# Altium PCB Servo_driver.PcbDoc
Units mm, origin at the board's own origin, x right, y up, seen from the top; angles counter-clockwise.
Board outline 152.4 x 101.6 mm, 2 copper layers (Top Layer, Bottom Layer); 101 components, 116 nets, 489 pads, 3 vias.
Unrouted connection lines stored in the file: 244.
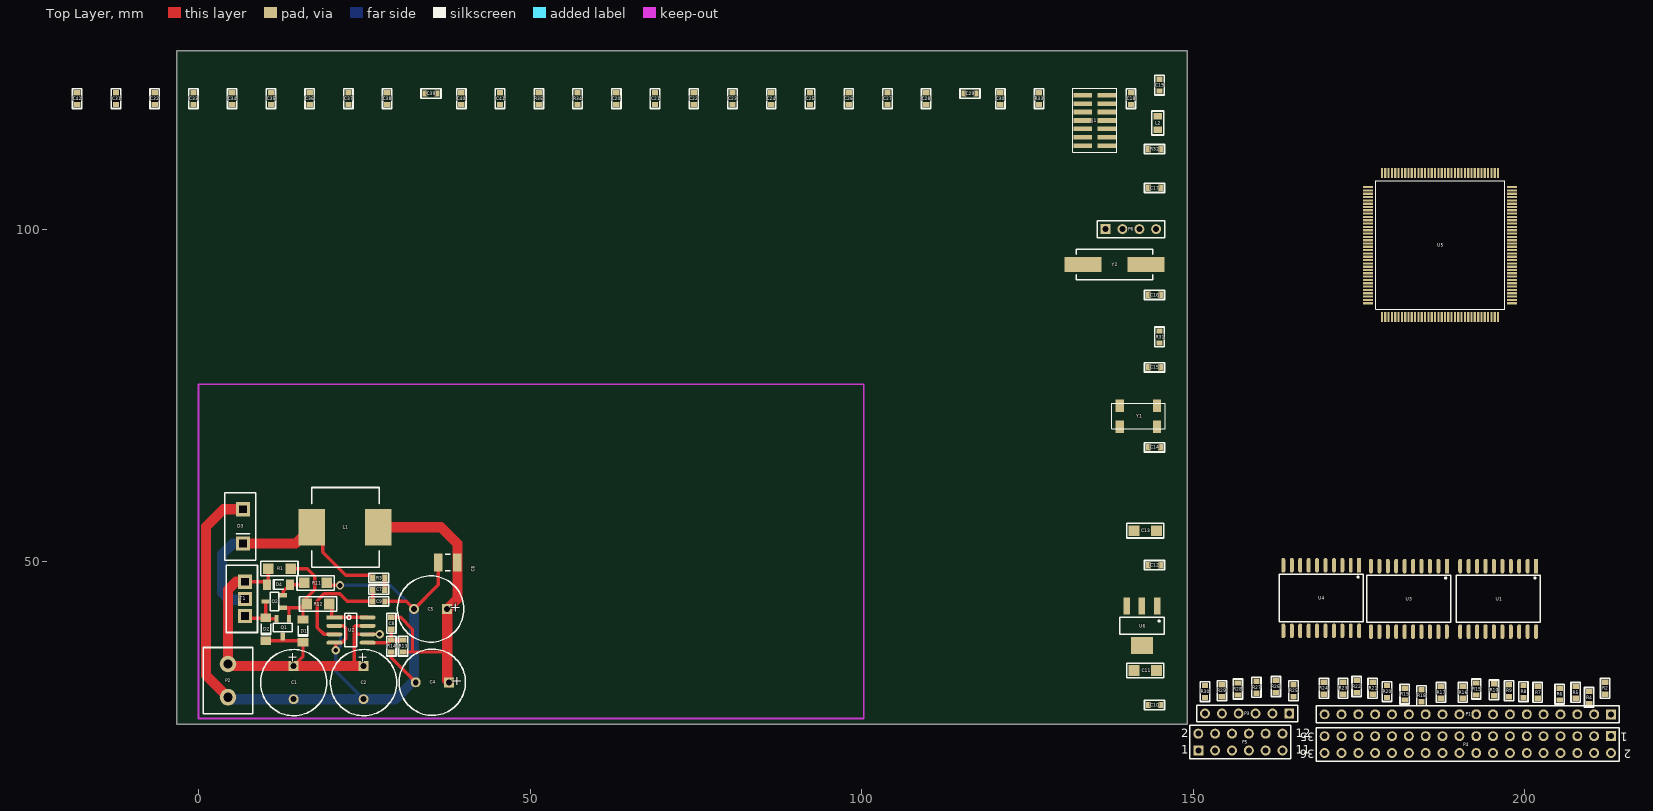
[diagram p0: Top Layer view]
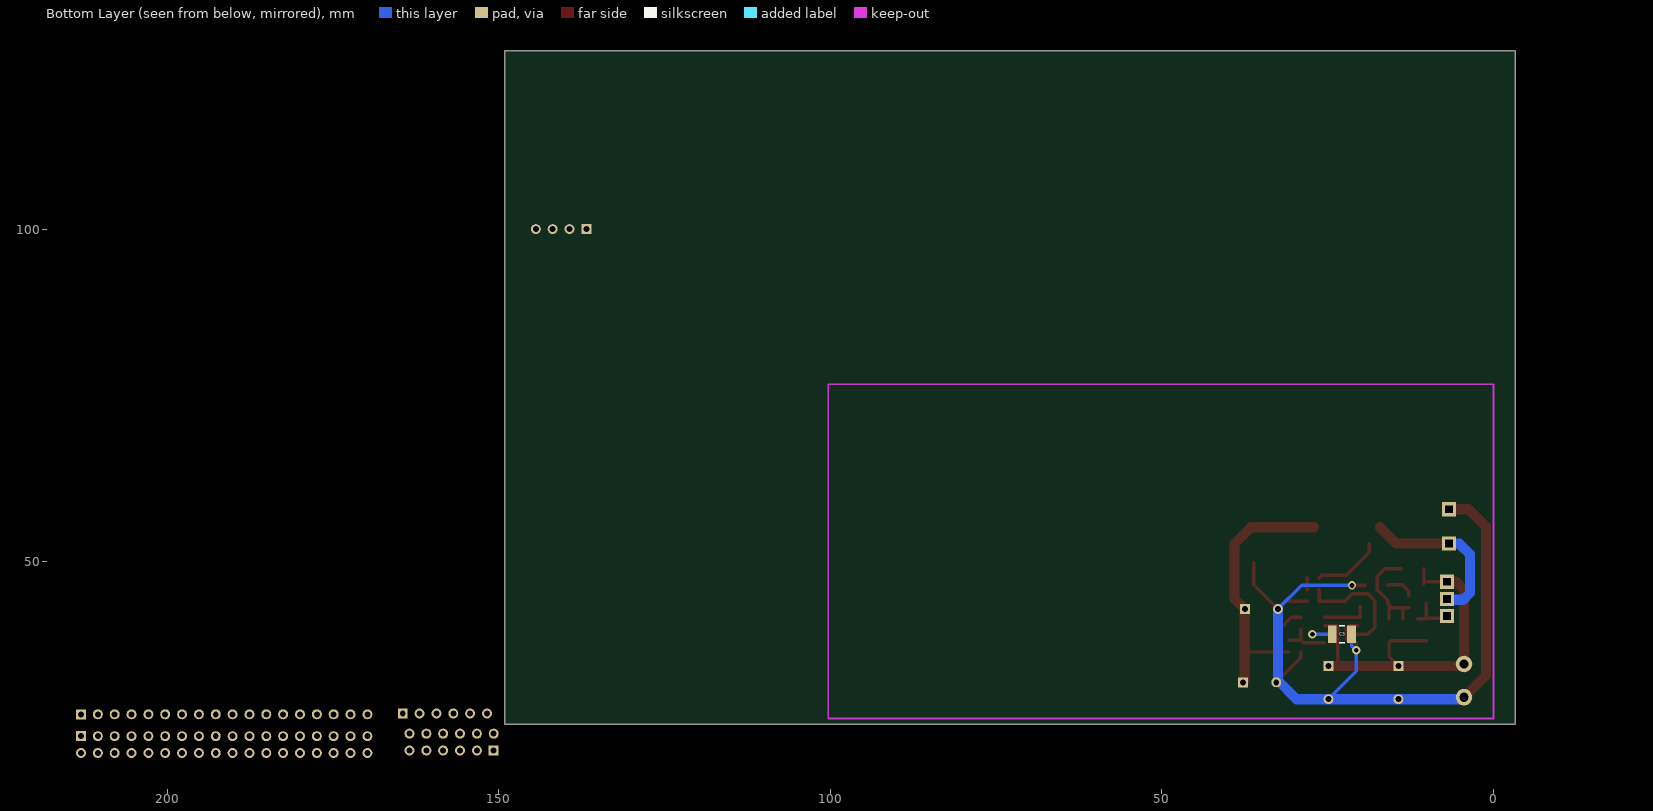
[diagram p1: Bottom Layer view, seen from below]

## Layer stack, top to bottom
Top Layer: signal copper 0.0356
Dielectric: dielectric 0.32, FR-4, Dk 4.8
Bottom Layer: signal copper 0.0356

## Board outline
-3.302,25.4 149.098,25.4 149.098,127 -3.302,127

## Design rules (kind name [scope] priority, off if disabled: settings)
Clearance [All] p1: gap=0.254
Height [All] p1: minheight=0 maxheight=50 prefheight=12.7
PolygonConnect [All] p1: connectstyle=Relief reliefconductorwidth=0.254 reliefentries=4 polygonreliefangle="90 Angle"
RoutingVias [All] p1: holewidth=0.711 width=1.27 viastyle="Through Hole" minholewidth=0.711 minwidth=1.27 maxholewidth=0.711 maxwidth=1.27
SilkscreenOverComponentPads [All] p1: minsilkscreentomaskgap=0.254
SolderMaskExpansion [All] p1: expansion=0.102
Width [All] p1: maxlimit=1.524 minlimit=0.254 preferedwidth=0.254
26 further rules are at their usual default settings.

## Components (designator, comment, footprint, x,y, rotation, side; value= is the part's Value field where it differs from the comment)
C1 "1000uF" cap_10x12 14.351,31.75 r180 top
C2 "1000uF" cap_10x12 24.892,31.75 r180 top
C3 "22uF" FP_1210_CAP_N 22.86,38.989 r0 bottom
C4 "1000uF" cap_10x12 35.306,31.75 r90 top
C5 "1000uF" cap_10x12 35.052,42.799 r90 top
C6 "22uF" FP_1210_CAP_N 37.592,49.784 r0 top
C7 "100pF" FP_0603_CAP_080 27.178,45.72 r180 top
C8 "4n7" FP_0603_CAP_080 29.083,40.64 r90 top
C9 "470pF" FP_0603_CAP_080 27.178,43.942 r0 top
C10 "100nF" FP_0603_CAP_080 144.145,28.321 r0 top
C11 "10uF" FP_1206_CAP_085 142.748,33.528 r0 top
C12 "100nF" FP_0603_CAP_080 144.145,49.403 r0 top
C13 "10uF" FP_1206_CAP_085 142.748,54.61 r0 top
C14 "12p" FP_0603_CAP_080 144.145,67.183 r0 top
C15 "12p" FP_0603_CAP_080 144.145,79.248 r0 top
C16 "22p" FP_0603_CAP_080 144.145,90.17 r0 top
C17 "22p" FP_0603_CAP_080 144.145,106.299 r0 top
C18 "10n" FP_0603_CAP_080 140.589,119.761 r90 top
C19 "1u 6V" FP_0603_CAP_080 144.907,121.793 r270 top
C20 "22nF" FP_0603_CAP_080 62.992,119.761 r90 top
C21 "22nF" FP_0603_CAP_080 68.834,119.761 r90 top
C22 "22nF" FP_0603_CAP_080 74.676,119.761 r90 top
C23 "22nF" FP_0603_CAP_080 80.518,119.761 r90 top
C24 "22nF" FP_0603_CAP_080 86.36,119.761 r90 top
C25 "22nF" FP_0603_CAP_080 92.202,119.761 r90 top
C26 "22nF" FP_0603_CAP_080 98.044,119.761 r90 top
C27 "22nF" FP_0603_CAP_080 103.886,119.761 r90 top
C28 "22nF" FP_0603_CAP_080 109.728,119.761 r90 top
C29 "22nF" FP_0603_CAP_080 116.332,120.523 r0 top
C30 "22nF" FP_0603_CAP_080 120.904,119.761 r90 top
C31 "2.2uF" FP_0603_CAP_080 -12.446,119.761 r90 top
C32 "2.2uF" FP_0603_CAP_080 -6.604,119.761 r90 top
C33 "2.2uF" FP_0603_CAP_080 -0.762,119.761 r90 top
C34 "2.2uF" FP_0603_CAP_080 5.08,119.761 r90 top
C35 "2.2uF" FP_0603_CAP_080 10.922,119.761 r90 top
C36 "2.2uF" FP_0603_CAP_080 16.764,119.761 r90 top
C37 "2.2uF" FP_0603_CAP_080 22.606,119.761 r90 top
C38 "2.2uF" FP_0603_CAP_080 28.448,119.761 r90 top
C39 "2.2uF" FP_0603_CAP_080 35.052,120.523 r0 top
C40 "2.2uF" FP_0603_CAP_080 39.624,119.761 r90 top
C41 "2.2uF" FP_0603_CAP_080 45.466,119.761 r90 top
C42 "100nF" FP_0603_CAP_080 -18.288,119.761 r90 top
D1 "18V" SOD-80 15.748,39.624 r180 top
D2 "18V" SOD-80 10.16,39.878 r180 top
D3 "SCHOTTKY" DIODE_TO220 6.731,55.245 r90 top
D4 "18V" SOD-80 12.192,46.482 r90 top
J1 "header 7x2 90degree" SMD_header_2x7_narrow 134.239,115.824 r90 top
L1 "100uH" SRR1206_T 22.098,55.118 r0 top
L2 "fbead" FP_0805_RES_SIMPLE 144.653,116.078 r270 top
P1 "Header 18" HDR1X18 212.979,26.924 r180 top
P2 "Header 2" "Sorkapocs 2P 5mm" 4.445,32.004 r90 top
P3 "Header 6" HDR1X6 164.465,27.051 r180 top
P4 "Header 18X2" HDR2X18 212.979,23.622 r180 top
P5 "Header 6X2" HDR2X6 150.749,21.463 r0 top
P6 "Header 4" HDR1X4 136.779,100.076 r0 top
Q1 "NPN" TR_SOT23 12.7,40.005 r90 top
Q2 "PNP" TR_SOT23 11.43,43.942 r0 top
R1 "100R" FP_1206_RES 12.192,48.895 r180 top
R2 "470R" FP_0603_RES 212.09,30.861 r270 top
R3 "150k" FP_0603_RES 27.178,47.498 r0 top
R4 "470R" FP_0603_RES 209.677,29.464 r270 top
R5 "470R" FP_0603_RES 207.645,30.226 r270 top
R6 "470R" FP_0603_RES 205.232,29.972 r270 top
R7 "470R" FP_0603_RES 201.93,30.226 r270 top
R8 "470R" FP_0603_RES 199.771,30.353 r270 top
R9 "470R" FP_0603_RES 197.612,30.48 r270 top
R10 "470R" FP_0603_RES 195.326,30.607 r270 top
R11 "220R" FP_1206_RES 17.653,46.736 r180 top
R12 "100R" FP_1206_RES 18.034,43.561 r180 top
R13 "3k6" FP_0603_RES 30.861,37.211 r270 top
R14 "1k2" FP_0603_RES 29.083,37.211 r90 top
R15 "470R" FP_0603_RES 192.659,30.734 r270 top
R16 "470R" FP_0603_RES 190.627,30.226 r270 top
R17 "470R" FP_0603_RES 187.325,30.226 r270 top
R18 "470R" FP_0603_RES 184.404,29.718 r270 top
R19 "470R" FP_0603_RES 181.864,29.972 r270 top
R20 "470R" FP_0603_RES 179.197,30.353 r270 top
R21 "470R" FP_0603_RES 177.038,30.861 r270 top
R22 "470R" FP_0603_RES 174.625,31.115 r270 top
R23 "470R" FP_0603_RES 172.593,30.861 r270 top
R24 "470R" FP_0603_RES 169.672,30.861 r270 top
R25 "470R" FP_0603_RES 165.1,30.48 r270 top
R26 "470R" FP_0603_RES 162.433,31.115 r270 top
R27 "470R" FP_0603_RES 159.512,30.988 r270 top
R28 "470R" FP_0603_RES 156.718,30.734 r270 top
R29 "470R" FP_0603_RES 154.305,30.48 r270 top
R30 "470R" FP_0603_RES 151.765,30.353 r270 top
R31 "390R" FP_0603_RES 144.907,83.82 r270 top
R32 "390R" FP_0603_RES 144.145,112.141 r0 top
R33 "0R" FP_0603_RES 126.746,119.761 r90 top
R34 "10k" FP_0603_RES 57.15,119.761 r90 top
R35 "10k" FP_0603_RES 51.308,119.761 r90 top
T1 "IRF4905" FET_TO220 6.985,44.323 r90 top
U1 "74HC244" DIGITAL_SOIC20W 195.961,44.323 r0 top
U2 "MC34063A" FP_SO8_MS012AA 22.987,39.624 r0 top
U3 "74HC244" DIGITAL_SOIC20W 182.499,44.323 r0 top
U4 "74HC244" DIGITAL_SOIC20W 169.291,44.45 r0 top
U5 "STM32F103Z*" LQFP144 187.198,97.663 r0 top
U6 "LD1117xx" SUPPLY_SOT223 142.24,40.259 r270 top
Y1 "Quartz 32.768 kHz" XTAL_ABS25 141.732,71.882 r0 top
Y2 "8MHz Quartz HC49" FP_CRYSTAL_HC49_SMD 133.35,94.742 r0 top

## Footprints (in the part's own frame and the unit in brackets; to place one, negate y for a bottom-side part, rotate by r counter-clockwise, add the part's x,y. Pads: shape width x height; smd on the part's side, far side on the other; paste and mask are expansions set on the pad)
cap_10x12 [mm] "height: any, dia:10 RM5.0"
  round 1.5 hole 0.9: N(0,2.551)
  rect 1.5x1.5 hole 0.9: P(0,-2.449)
  silkscreen extent -5,-4.95 5,5.05, body extent -5.06,-5.04 5.06,5.08, height 12.7
DIGITAL_SOIC20W [mm]
  rect 0.6x2.2 smd: 1(5.715,4.94)
  oval 0.6x2.2 smd: 2(4.445,4.94) 3(3.175,4.94) 4(1.905,4.94) 5(0.635,4.94) 6(-0.635,4.94) 7(-1.905,4.94) 8(-3.175,4.94) 9(-4.445,4.94) 10(-5.715,4.94) 11(-5.715,-4.94) 12(-4.445,-4.94) 13(-3.175,-4.94) 14(-1.905,-4.94) 15(-0.635,-4.94) 16(0.635,-4.94) 17(1.905,-4.94) 18(3.175,-4.94) 19(4.445,-4.94) 20(5.715,-4.94)
  silkscreen extent -6.35,-3.56 6.32,3.56, body extent -6.4,-5.15 6.4,5.15, height 2.7
DIODE_TO220 [mil]
  rect 84x84 hole 44 square: A(102,0) K(-102,0)
  silkscreen extent -200,-75 200,110, body extent -200,-70 210,107, height 1000
FET_TO220 [mil]
  rect 84x84 hole 44 square: D(0,0) G(-102,0) S(102,0)
  silkscreen extent -200,-75 200,110, body extent -200,-70 210,107, height 1000
FP_0603_CAP_080 [mm] "0.8mm magas 0603 kapacitás"
  rect 0.8x0.95 smd: 1(-0.9,0) 2(0.9,0)
  silkscreen extent -1.5,-0.7 1.5,0.7, body extent -0.8,-0.4 0.76,0.4, height 0.8
FP_0603_RES [mm] "0603 ellenállás"
  rect 0.8x0.95 smd: 1(-0.9,0) 2(0.9,0)
  silkscreen extent -1.5,-0.7 1.5,0.7, body extent -0.8,-0.4 0.8,0.4, height 0.44
FP_0805_RES_SIMPLE [mm] "0805 ellenállás, amit én csináltam"
  rect 1x1.3 smd: 1(-1,0) 2(1,0)
  silkscreen extent -1.8,-0.9 1.8,0.9, body extent -1,-0.64 1.03,0.64, height 0.5
FP_1206_CAP_085 [mm] "1206 kapacitás 0.85 mm"
  rect 1.6x1.6 smd: 1(-1.7,0) 2(1.7,0)
  silkscreen extent -2.8,-1.1 2.8,1.1, body extent -1.52,-0.79 1.58,0.79, height 0.85
FP_1206_RES [mm] "1206 ellenállás"
  rect 1.6x1.6 smd: 1(-1.7,0) 2(1.7,0)
  silkscreen extent -2.8,-1.1 2.8,1.1, body extent -1.6,-0.8 1.6,0.8, height 0.62
FP_1210_CAP_N [mm] "Chip Capacitor, Body 3.2x2.5mm, IPC Medium Density"
  rect 1.3x2.7 smd: 1(-1.45,0) 2(1.45,0)
  silkscreen extent -0.4,-1.25 0.4,1.25, body extent -1.6,-1.25 1.6,1.25, height 2.5
FP_CRYSTAL_HC49_SMD [mil] "HC49/SMD"
  rect 220x90 smd: 1(0,0) 2(375,0)
  silkscreen extent -40,-90 415,90, body extent -57,-90 432,90, height 130
FP_SO8_MS012AA [mm] "SO8 JEDEC MS-012AA, Analog Devices R-8, SO8-SOT96-1, NS M08A"
  rect 2.4x0.6 smd: 1(-2.5,1.905)
  oval 2.4x0.6 smd: 2(-2.5,0.635) 3(-2.5,-0.635) 4(-2.5,-1.905) 5(2.5,-1.905) 6(2.5,-0.635) 7(2.5,0.635) 8(2.5,1.905)
  silkscreen extent -0.9,-2.5 0.9,2.5, body extent -3.03,-2.5 3.03,2.5, height 1.9
HDR1X4 [mm] "Connector; Header; 4 Position"
  rect 1.5x1.5 hole 0.9: 1(0,0)
  round 1.5 hole 0.9: 2(2.54,0) 3(5.08,0) 4(7.62,0)
  silkscreen extent -1.27,-1.27 8.89,1.27
HDR1X6 [mm] "Connector; Header; 6 Position"
  rect 1.5x1.5 hole 0.9: 1(0,0)
  round 1.5 hole 0.9: 2(2.54,0) 3(5.08,0) 4(7.62,0) 5(10.16,0) 6(12.7,0)
  silkscreen extent -1.27,-1.27 13.97,1.27
HDR1X18 [mm] "Connector; Header; 18 Position"
  rect 1.5x1.5 hole 0.9: 1(0,0)
  round 1.5 hole 0.9: 2(2.54,0) 3(5.08,0) 4(7.62,0) 5(10.16,0) 6(12.7,0) 7(15.24,0) 8(17.78,0) 9(20.32,0) 10(22.86,0) 11(25.4,0) 12(27.94,0) 13(30.48,0) 14(33.02,0) 15(35.56,0) 16(38.1,0) 17(40.64,0) 18(43.18,0)
  silkscreen extent -1.27,-1.27 44.45,1.27
HDR2X6 [mm] "Connector; Header; 6x2 Position"
  rect 1.5x1.5 hole 0.9: 1(0,0)
  round 1.5 hole 0.9: 2(0,2.54) 3(2.54,0) 4(2.54,2.54) 5(5.08,0) 6(5.08,2.54) 7(7.62,0) 8(7.62,2.54) 9(10.16,0) 10(10.16,2.54) 11(12.7,0) 12(12.7,2.54)
  silkscreen extent -1.27,-1.27 13.97,3.81
HDR2X18 [mm] "Connector; Header; 18x2 Position"
  rect 1.5x1.5 hole 0.9: 1(0,0)
  round 1.5 hole 0.9: 2(0,2.54) 3(2.54,0) 4(2.54,2.54) 5(5.08,0) 6(5.08,2.54) 7(7.62,0) 8(7.62,2.54) 9(10.16,0) 10(10.16,2.54) 11(12.7,0) 12(12.7,2.54) 13(15.24,0) 14(15.24,2.54) 15(17.78,0) 16(17.78,2.54) 17(20.32,0) 18(20.32,2.54) 19(22.86,0) 20(22.86,2.54) 21(25.4,0) 22(25.4,2.54) 23(27.94,0) 24(27.94,2.54) 25(30.48,0) 26(30.48,2.54) 27(33.02,0) 28(33.02,2.54) 29(35.56,0) 30(35.56,2.54) 31(38.1,0) 32(38.1,2.54) 33(40.64,0) 34(40.64,2.54) 35(43.18,0) 36(43.18,2.54)
  silkscreen extent -1.27,-1.27 44.45,3.81
LQFP144 [mm] "20x12"
  rect 0.33x1.5 smd mask+0.076: 1(-8.75,-10.85) 2(-8.25,-10.85) 3(-7.75,-10.85) 4(-7.25,-10.85) 5(-6.75,-10.85) 6(-6.25,-10.85) 7(-5.75,-10.85) 8(-5.25,-10.85) 9(-4.75,-10.85) 10(-4.25,-10.85) 11(-3.75,-10.85) 12(-3.25,-10.85) 13(-2.75,-10.85) 14(-2.25,-10.85) 15(-1.75,-10.85) 16(-1.25,-10.85) 17(-0.75,-10.85) 18(-0.25,-10.85) 19(0.25,-10.85) 20(0.75,-10.85) 21(1.25,-10.85) 22(1.75,-10.85) 23(2.25,-10.85) 24(2.75,-10.85) 25(3.25,-10.85) 26(3.75,-10.85) 27(4.25,-10.85) 28(4.75,-10.85) 29(5.25,-10.85) 30(5.75,-10.85) 31(6.25,-10.85) 32(6.75,-10.85) 33(7.25,-10.85) 34(7.75,-10.85) 35(8.25,-10.85) 36(8.75,-10.85) 73(8.75,10.85) 74(8.25,10.85) 75(7.75,10.85) 76(7.25,10.85) 77(6.75,10.85) 78(6.25,10.85) 79(5.75,10.85) 80(5.25,10.85) 81(4.75,10.85) 82(4.25,10.85) 83(3.75,10.85) 84(3.25,10.85) 85(2.75,10.85) 86(2.25,10.85) 87(1.75,10.85) 88(1.25,10.85) 89(0.75,10.85) 90(0.25,10.85) 91(-0.25,10.85) 92(-0.75,10.85) 93(-1.25,10.85) 94(-1.75,10.85) 95(-2.25,10.85) 96(-2.75,10.85) 97(-3.25,10.85) 98(-3.75,10.85) 99(-4.25,10.85) 100(-4.75,10.85) 101(-5.25,10.85) 102(-5.75,10.85) 103(-6.25,10.85) 104(-6.75,10.85) 105(-7.25,10.85) 106(-7.75,10.85) 107(-8.25,10.85) 108(-8.75,10.85)
  rect 1.5x0.33 smd mask+0.076: 37(10.85,-8.75) 38(10.85,-8.25) 39(10.85,-7.75) 40(10.85,-7.25) 41(10.85,-6.75) 42(10.85,-6.25) 43(10.85,-5.75) 44(10.85,-5.25) 45(10.85,-4.75) 46(10.85,-4.25) 47(10.85,-3.75) 48(10.85,-3.25) 49(10.85,-2.75) 50(10.85,-2.25) 51(10.85,-1.75) 52(10.85,-1.25) 53(10.85,-0.75) 54(10.85,-0.25) 55(10.85,0.25) 56(10.85,0.75) 57(10.85,1.25) 58(10.85,1.75) 59(10.85,2.25) 60(10.85,2.75) 61(10.85,3.25) 62(10.85,3.75) 63(10.85,4.25) 64(10.85,4.75) 65(10.85,5.25) 66(10.85,5.75) 67(10.85,6.25) 68(10.85,6.75) 69(10.85,7.25) 70(10.85,7.75) 71(10.85,8.25) 72(10.85,8.75) 109(-10.85,8.75) 110(-10.85,8.25) 111(-10.85,7.75) 112(-10.85,7.25) 113(-10.85,6.75) 114(-10.85,6.25) 115(-10.85,5.75) 116(-10.85,5.25) 117(-10.85,4.75) 118(-10.85,4.25) 119(-10.85,3.75) 120(-10.85,3.25) 121(-10.85,2.75) 122(-10.85,2.25) 123(-10.85,1.75) 124(-10.85,1.25) 125(-10.85,0.75) 126(-10.85,0.25) 127(-10.85,-0.25) 128(-10.85,-0.75) 129(-10.85,-1.25) 130(-10.85,-1.75) 131(-10.85,-2.25) 132(-10.85,-2.75) 133(-10.85,-3.25) 134(-10.85,-3.75) 135(-10.85,-4.25) 136(-10.85,-4.75) 137(-10.85,-5.25) 138(-10.85,-5.75) 139(-10.85,-6.25) 140(-10.85,-6.75) 141(-10.85,-7.25) 142(-10.85,-7.75) 143(-10.85,-8.25) 144(-10.85,-8.75)
  silkscreen extent -9.7,-9.65 9.75,9.7, body extent -11,-11 11,11, height 1.6
SMD_header_2x7_narrow [mm]
  rect 0.7x2.794 smd: 1(4.445,0.94) 2(4.445,-2.7) 3(3.175,0.94) 4(3.175,-2.7) 5(1.905,0.94) 6(1.905,-2.7) 7(0.635,0.94) 8(0.635,-2.7) 9(-0.635,0.94) 10(-0.635,-2.7) 11(-1.905,0.94) 12(-1.905,-2.7) 13(-3.175,0.94) 14(-3.175,-2.7)
  silkscreen extent -4.19,-4.19 5.46,2.41, body extent -3.81,-3.77 5.08,1.73, height 4.51
SOD-80 [mm]
  rect 1.6x1.25 smd: A(0,-1.598) K(0,1.852)
  silkscreen extent -0.7,-0.67 0.7,0.93, body extent -0.76,-1.55 0.78,1.8
"Sorkapocs 2P 5mm" [mm]
  round 2.5 hole 1.4: 1(-2.5,0) 2(2.5,0)
  silkscreen extent -5,-3.75 5,3.75, body extent -5,-4.5 5,4.5, height 15.2
SRR1206_T [mm] "POWER INDUCTOR"
  rect 4x5.5 smd: 1(-5,0) 2(5,0)
  silkscreen extent -5,-6 5.16,6, body extent -5.97,-5.97 6.23,6.23, height 6
SUPPLY_SOT223 [mm] "SOT223 package, 3 leads"
  rect 2.55x0.95 smd: 1(-2.975,2.3) 2(-2.975,0) 3(-2.975,-2.3)
  rect 2.55x3.3 smd: 2(2.975,0)
  silkscreen extent -1.3,-3.35 1.3,3.35, body extent -3.5,-3.25 3.5,3.25, height 1.65
TR_SOT23 [mm] "SOT23-3 tok"
  rect 1.2x0.65 smd: B(1.327,-0.95) C(-1.327,0) E(1.327,0.95)
  silkscreen extent -0.64,-1.4 0.64,1.4, body extent -1.27,-1.46 1.27,1.46, height 0.97
XTAL_ABS25 [mil]
  rect 50x75 smd: 1(-110,-62.5) 2(110,-62.5) 3(110,62.5) 4(-110,62.5)
  silkscreen extent -158,-75 158,75, body extent -157,-79 157,79, height 106

## Part data
C1 C2 C4 C5: library part CAP_ELECT, "Polarized Capacitor"
C3 C6: library part CAP, "Capacitor"
C7 C8 C9 C10 C11 C12 C13 C14 C15 C16 C17 C18 C19 C20 C21 C22 C23 C24 C25 C26 C27 C28 C29 C30 C31 C32 C33 C34 C35 C36 C37 C38 C39 C40 C41 C42: library part Cap, "Capacitor"
D1 D2 D4: library part ZENER, "Zener Diode"
D3: "NXP - PMEG3020EJ,115 - SCHOTTKY RECT 30V 2A SOD323F"
J1: library part ARM_JTAG_PROG
L1: library part L
L2: library part Inductor, "FBEAD"
P1: "Header, 18-Pin"
P2: "Header, 2-Pin"
P3: "Header, 6-Pin"
P4: "Header, 18-Pin, Dual row"
P5: "Header, 6-Pin, Dual row"
P6: "Header, 4-Pin"
R1 R2 R3 R4 R5 R6 R7 R8 R9 R10 R11 R12 R13 R14 R15 R16 R17 R18 R19 R20 R21 R22 R23 R24 R25 R26 R27 R28 R29 R30 R31 R32 R34 R35: library part Res3, "Resistor"
R33: library part Res1, "Resistor"
T1: library part PMOS
U1 U3 U4: "Octqal buffer 3-state line driver"
U5: library part STM32F103Zxxx
U6: "LD1117xx 3,3V lin reg"
Y1: library part "XTAL_32,768khz ABS25 SMD", "XTAL_32,768khz ABS25 SMD"
Y2: library part "XTAL HC49", "Standard HC49 quartz"

## Via types
v1: diameter 1.27, hole 0.711, Top Layer to Bottom Layer, 3 vias

## Nets (pads, with @x,y where several pads share a name; then routed paths per layer and width w, separated by ;. In a path a pad name is that pad's centre, name@x,y a point inside that pad or via, vN(x,y) a via of type N, cw(c..) or ccw(c..) an arc to the next point about the centre after c; other vN are vias at no path point)
3V3: C12.1 C13.2 J1.6 R35.2 U6.2
5V: C4.P C5.P C6.2 C8.2 L1.2 P4.1 P4.3 P4.5 P4.7 P4.9 P4.11 P4.13 P4.15 P4.17 P4.19 P4.21 P4.23 P4.25 P4.27 P4.29 P4.31 P4.33 P4.35 P5.1 P5.3 P5.5 P5.7 P5.9 P5.11 R13.2 U1.20 U3.20 U4.20 | length 48.6
  Top Layer w0.508: C8.2 30.469,41.54 32.258,39.751 32.258,36.311 ; R13.2 32.258,36.311 ; 37.501,36.322 37.49,36.311 32.258,36.311
  Top Layer w1.524: L1.2 36.576,55.118 39.042,52.652 C6.2 39.042,44.34 C5.P 37.501,36.322 37.501,32.004 C4.P
A/D1: U5.26
A/D2: U5.27
A/D3: U5.28
A/D4: U5.29
AGND: C18.1 C19.1 R33.1 U5.30 U5.31
BOOT0: J1.5 R34.1 U5.138
DIGITAL_OUT_1: U4.4
DIGITAL_OUT_2: U4.5
DIGITAL_OUT_3: U4.6
DIGITAL_OUT_4: U4.7
DIGITAL_OUT_5: U4.8
DIGITAL_OUT_6: U4.9
GND: C1.N C2.N C3.1 C4.N C5.N C6.1 C9.2 C10.1 C11.2 C12.2 C13.1 C14.1 C15.1 C16.1 C17.1 C20.1 C21.1 C22.1 C23.1 C24.1 C25.1 C26.1 C27.1 C28.1 C29.1 C30.1 C31.2 C32.2 C33.2 C34.2 C35.2 C36.2 C37.2 C38.2 C39.2 C40.2 C41.2 C42.2 D3.A J1.1 J1.13 P2.1 P4.2 P4.4 P4.6 P4.8 P4.10 P4.12 P4.14 P4.16 P4.18 P4.20 P4.22 P4.24 P4.26 P4.28 P4.30 P4.32 P4.34 P4.36 P5.2 P5.4 P5.6 P5.8 P5.10 P5.12 P6.3 R11.1 R14.1 R33.2 R34.2 U1.10 U2.2 U2.4 U3.10 U4.10 U5.16 U5.38 U5.48 U5.51 U5.61 U5.71 U5.83 U5.94 U5.107 U5.120 U5.130 U5.143 U6.1 Y1.2 Y1.3 | length 126.9
  Top Layer w0.508: C1.N@14.046,29.504 C1.N ; R11.1@19.353,46.355 v1(21.336,46.355) ; U2.2 21.844,40.259 22.195,39.908 22.195,38.324 21.59,37.719 20.701,37.719 v1(20.701,36.576) ; C9.2 31.358,43.942 C5.N 36.142,46.44 C6.1 ; R14.1 29.083,35.422 C4.N
  Top Layer w1.524: P2.1 1.143,32.806 1.143,55.22 3.759,57.836 D3.A
  Bottom Layer w0.508: v1(21.336,46.355) 28.945,46.355 C5.N ; C3.1 21.41,37.285 v1(20.701,36.576) 20.701,33.39 C2.N ; C4.N@32.501,32.004 C4.N
  Bottom Layer w1.524: P2.1 4.75,29.199 C1.N C2.N 29.696,29.199 32.501,32.004 C5.N
MISO: U5.42
MOSI: U5.43
NetC7_1: C7.1 R3.2 | length 1.8
  Top Layer w0.508: C7.1 R3.2
NetC7_2: C7.2 C9.1 U2.3 | length 19
  Top Layer w0.508: U2.3@21.336,38.989 U2.3 18.923,38.989 17.907,40.005 17.907,44.069 18.923,45.085 21.29,45.085 22.433,43.942 C9.1 C7.2
NetC8_1: C8.1 R13.1 R14.2 U2.5 | length 7.2
  Top Layer w0.508: U2.5 28.691,37.719 R14.2 ; C8.1 R14.2 ; R13.1 R14.2
NetC15_2: C15.2 R31.2 Y1.1
NetC17_2: C17.2 R32.2 Y2.1
NetD1_A: D1.A Q1.B Q2.B R1.1 R12.2 | length 16
  Top Layer w0.508: Q2.B 15.384,42.992 R12.2@15.748,43.356 ; Q1.B 13.65,42.799 ; R1.1 16.383,48.895 17.526,47.752 17.526,45.72 15.953,44.147 15.953,43.561 R12.2@15.748,43.356 ; D1.A R12.2@15.748,43.356
NetD2_A: D2.A Q1.E Q2.C T1.G | length 7.3
  Top Layer w0.508: T1.G 6.655,41.402 D2.A@9.906,41.402 ; Q2.C@10.16,43.688 D2.A 10.304,41.332 Q1.E@11.43,41.332
NetD3_K: D3.K L1.1 R3.1 T1.D | length 35.4
  Top Layer w0.508: L1.1@18.72,52.654 18.72,51.384 22.225,47.879 25.897,47.879 R3.1
  Top Layer w1.524: D3.K 14.634,52.654 L1.1 ; T1.D@6.858,44.196 T1.D
  Bottom Layer w1.524: D3.K 5.156,52.654 3.556,51.054 3.556,45.212 4.572,44.196 T1.D@6.858,44.196
NetD4_A: D4.A Q2.E R11.2 | length 4.2
  Top Layer w0.508: Q2.E 12.757,45.449 D4.A 15.826,46.482 R11.2@15.953,46.355
NetP1_1: P1.1 R2.2
NetP1_2: P1.2 R4.2
NetP1_3: P1.3 R5.2
NetP1_4: P1.4 R6.2
NetP1_5: P1.5 R7.2
NetP1_6: P1.6 R8.2
NetP1_7: P1.7 R9.2
NetP1_8: P1.8 R10.2
NetP1_9: P1.9 R15.2
NetP1_10: P1.10 R16.2
NetP1_11: P1.11 R17.2
NetP1_12: P1.12 R18.2
NetP1_13: P1.13 R19.2
NetP1_14: P1.14 R20.2
NetP1_15: P1.15 R21.2
NetP1_16: P1.16 R22.2
NetP1_17: P1.17 R23.2
NetP1_18: P1.18 R24.2
NetP3_1: P3.1 R25.2
NetP3_2: P3.2 R26.2
NetP3_3: P3.3 R27.2
NetP3_4: P3.4 R28.2
NetP3_5: P3.5 R29.2
NetP3_6: P3.6 R30.2
NetR2_1: R2.1 U1.18
NetR4_1: R4.1 U1.17
NetR5_1: R5.1 U1.16
NetR6_1: R6.1 U1.15
NetR7_1: R7.1 U1.14
NetR8_1: R8.1 U1.13
NetR9_1: R9.1 U1.12
NetR10_1: R10.1 U1.11
NetR12_1: R12.1 U2.1 U2.8 | length 7
  Top Layer w0.508: R12.1@20.066,43.18 20.066,41.656 20.193,41.529 U2.1 U2.8
NetR15_1: R15.1 U3.18
NetR16_1: R16.1 U3.17
NetR17_1: R17.1 U3.16
NetR18_1: R18.1 U3.15
NetR19_1: R19.1 U3.14
NetR20_1: R20.1 U3.13
NetR21_1: R21.1 U3.12
NetR22_1: R22.1 U3.11
NetR23_1: R23.1 U4.18
NetR24_1: R24.1 U4.17
NetR25_1: R25.1 U4.16
NetR26_1: R26.1 U4.15
NetR27_1: R27.1 U4.14
NetR28_1: R28.1 U4.13
NetR29_1: R29.1 U4.12
NetR30_1: R30.1 U4.11
NRST: C42.1 J1.12 R35.1 U5.134
NSS: U5.40
NTRST: J1.7 U5.25
OSC32_IN: C14.2 U5.8 Y1.4
OSC32_OUT: R31.1 U5.9
OSC_IN: C16.2 U5.23 Y2.2
OSC_OUT: R32.1 U5.24
PROG_RX: J1.4 U5.102
PROG_TX: J1.3 U5.101
RX: U5.119
SCK: U5.41
SCL: U5.69
SDA: U5.70
SERVO_PWM1: U1.2 U5.4
SERVO_PWM2: U1.3 U5.5
SERVO_PWM3: U1.4 U5.18
SERVO_PWM4: U1.5 U5.19
SERVO_PWM5: U1.6 U5.20
SERVO_PWM6: U1.7 U5.21
SERVO_PWM7: U1.8 U5.34
SERVO_PWM8: U1.9 U5.35
SERVO_PWM9: U3.2 U5.36
SERVO_PWM10: U3.3 U5.37
SERVO_PWM11: U3.4 U5.96
SERVO_PWM12: U3.5 U5.97
SERVO_PWM13: U3.6 U5.98
SERVO_PWM14: U3.7 U5.99
SERVO_PWM15: U3.8 U5.136
SERVO_PWM16: U3.9 U5.137
SERVO_PWM17: U4.2 U5.139
SERVO_PWM18: U4.3 U5.140
TCK: J1.10 P6.4 U5.109
TDI: J1.9 U5.110
TDO: J1.8 U5.133
TMS: J1.11 P6.2 U5.105
TX: U5.122
VCC: C20.2 C21.2 C22.2 C23.2 C24.2 C25.2 C26.2 C27.2 C28.2 C29.2 C30.2 C31.1 C32.1 C33.1 C34.1 C35.1 C36.1 C37.1 C38.1 C39.1 C40.1 C41.1 L2.1 P6.1 U5.17 U5.39 U5.52 U5.62 U5.72 U5.84 U5.95 U5.108 U5.121 U5.131 U5.144
VDA: C18.2 C19.2 L2.2 U5.33
VDU_BAT: U5.6
VIN: C1.P C2.P C3.2 C10.2 C11.1 D1.K D2.K D4.K P2.2 Q1.C R1.2 T1.S U2.6 U2.7 U6.3 | length 63.4
  Top Layer w0.508: T1.S@7.239,46.914 D4.K@9.908,46.914 ; D2.K 15.494,38.026 D1.K 15.748,35.596 C1.P C1.P@14.046,34.504 ; D4.K@10.492,46.609 R1.2 ; 23.495,34.199 23.495,38.735 ; U2.6@24.31,38.989 23.495,38.989 23.495,40.132 23.622,40.259 U2.7 ; U2.6 v1(27.305,38.989)
  Top Layer w1.524: T1.S@7.239,46.914 T1.S 5.639,46.914 4.445,45.72 P2.2 4.75,34.199 C1.P 23.241,34.199 ; 23.495,34.199 C2.P
  Bottom Layer w0.508: C3.2 v1(27.305,38.989)
VREFH: U5.32
pads on no net: J1.2 J1.14 U1.1 U1.19 U3.1 U3.19 U4.1 U4.19 U5.1 U5.2 U5.3 U5.7 U5.10 U5.11 U5.12 U5.13 U5.14 U5.15 U5.22 U5.44 U5.45 U5.46 U5.47 U5.49 U5.50 U5.53 U5.54 U5.55 U5.56 U5.57 U5.58 U5.59 U5.60 U5.63 U5.64 U5.65 U5.66 U5.67 U5.68 U5.73 U5.74 U5.75 U5.76 U5.77 U5.78 U5.79 U5.80 U5.81 U5.82 U5.85 U5.86 U5.87 U5.88 U5.89 U5.90 U5.91 U5.92 U5.93 U5.100 U5.103 U5.104 U5.106 U5.111 U5.112 U5.113 U5.114 U5.115 U5.116 U5.117 U5.118 U5.123 U5.124 U5.125 U5.126 U5.127 U5.128 U5.129 U5.132 U5.135 U5.141 U5.142

## Keep-outs
Keep-Out Layer:
  lines w0.254: 0,26.289 100.33,26.289 100.33,76.708 0,76.708 0,26.289

## Text inside footprints (layer, text, board x,y; h text height)
C1: Top Overlay "+" at 13.589,36.322 h1.5 r270
C2: Top Overlay "+" at 24.13,36.322 h1.5 r270
C4: Top Overlay "+" at 39.878,32.512 h1.5 r180
C5: Top Overlay "+" at 39.624,43.561 h1.5 r180
P4: Top Overlay "36" at 168.275,21.59 h1.27 r180; Top Overlay "35" at 168.275,24.13 h1.27 r180; Top Overlay "1" at 215.519,24.13 h1.27 r180; Top Overlay "2" at 216.027,21.59 h1.27 r180
P5: Top Overlay "12" at 165.481,23.495 h1.27; Top Overlay "1" at 166.497,20.955 h1.27; Top Overlay "1" at 165.481,20.955 h1.27; Top Overlay "1" at 148.209,20.955 h1.27; Top Overlay "2" at 148.209,23.495 h1.27